# Altium PCB Copy of Game_Consol - Copy.PcbDoc
Units mil, origin at the board's own origin, x right, y up, seen from the top; angles counter-clockwise.
Board outline 3090.55 x 1732.28 mil, 2 copper layers (Top Layer, Bottom Layer); 55 components, 44 nets, 218 pads, 47 vias.
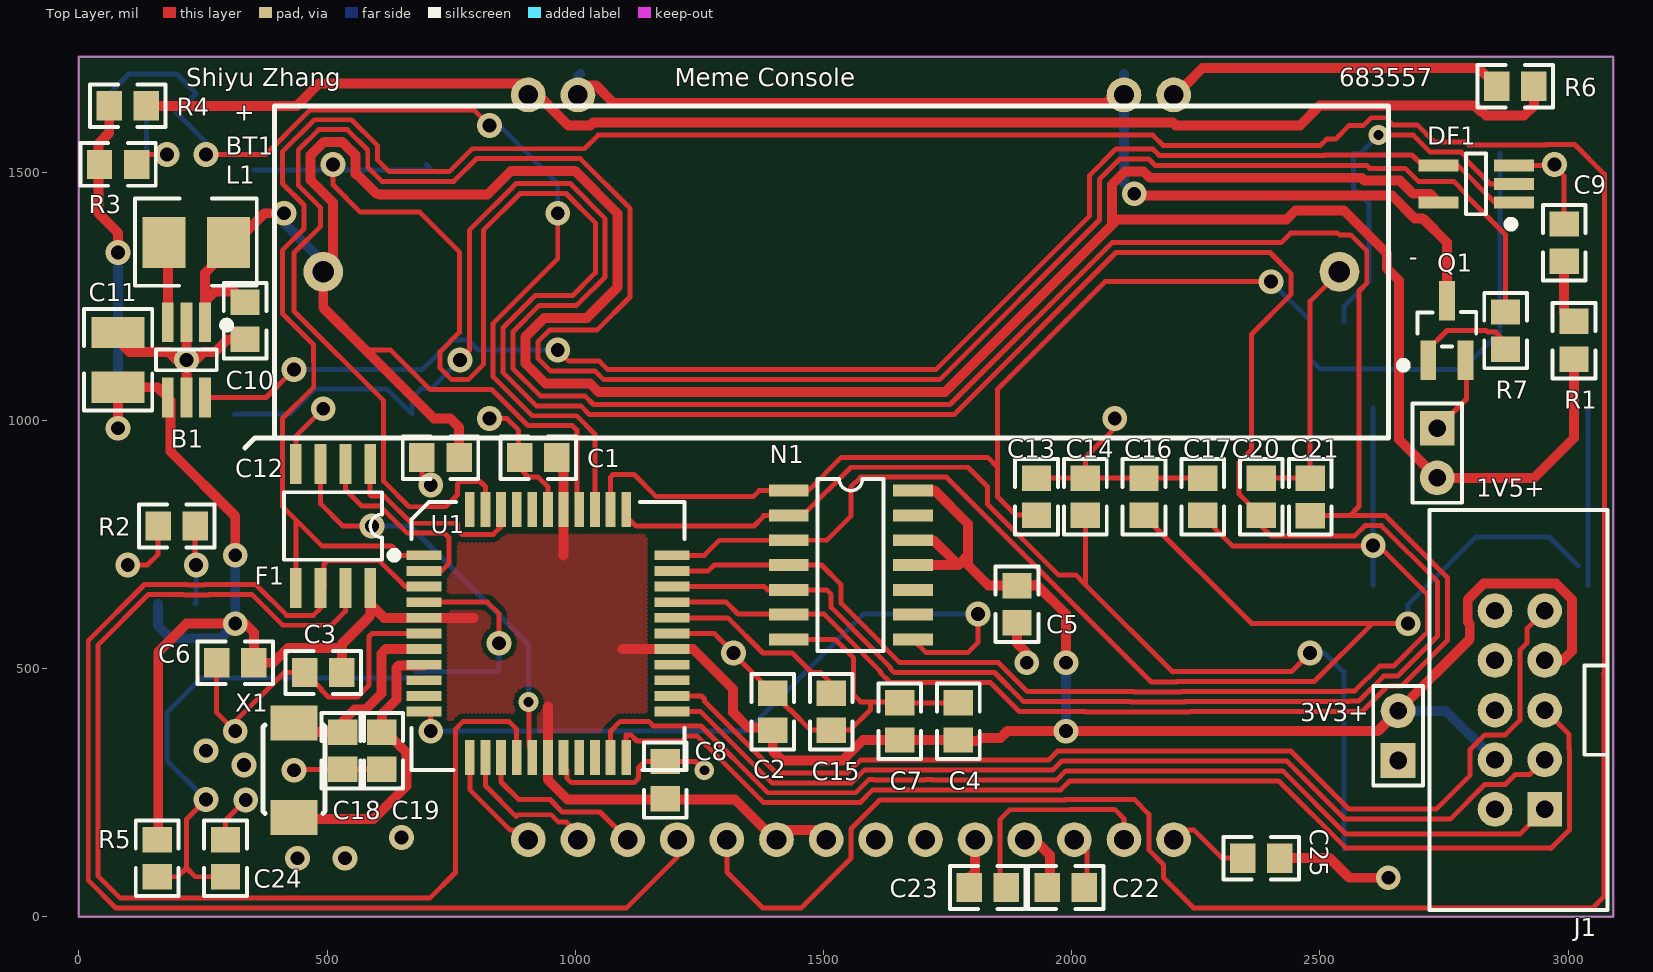
[diagram p0: Top Layer view]
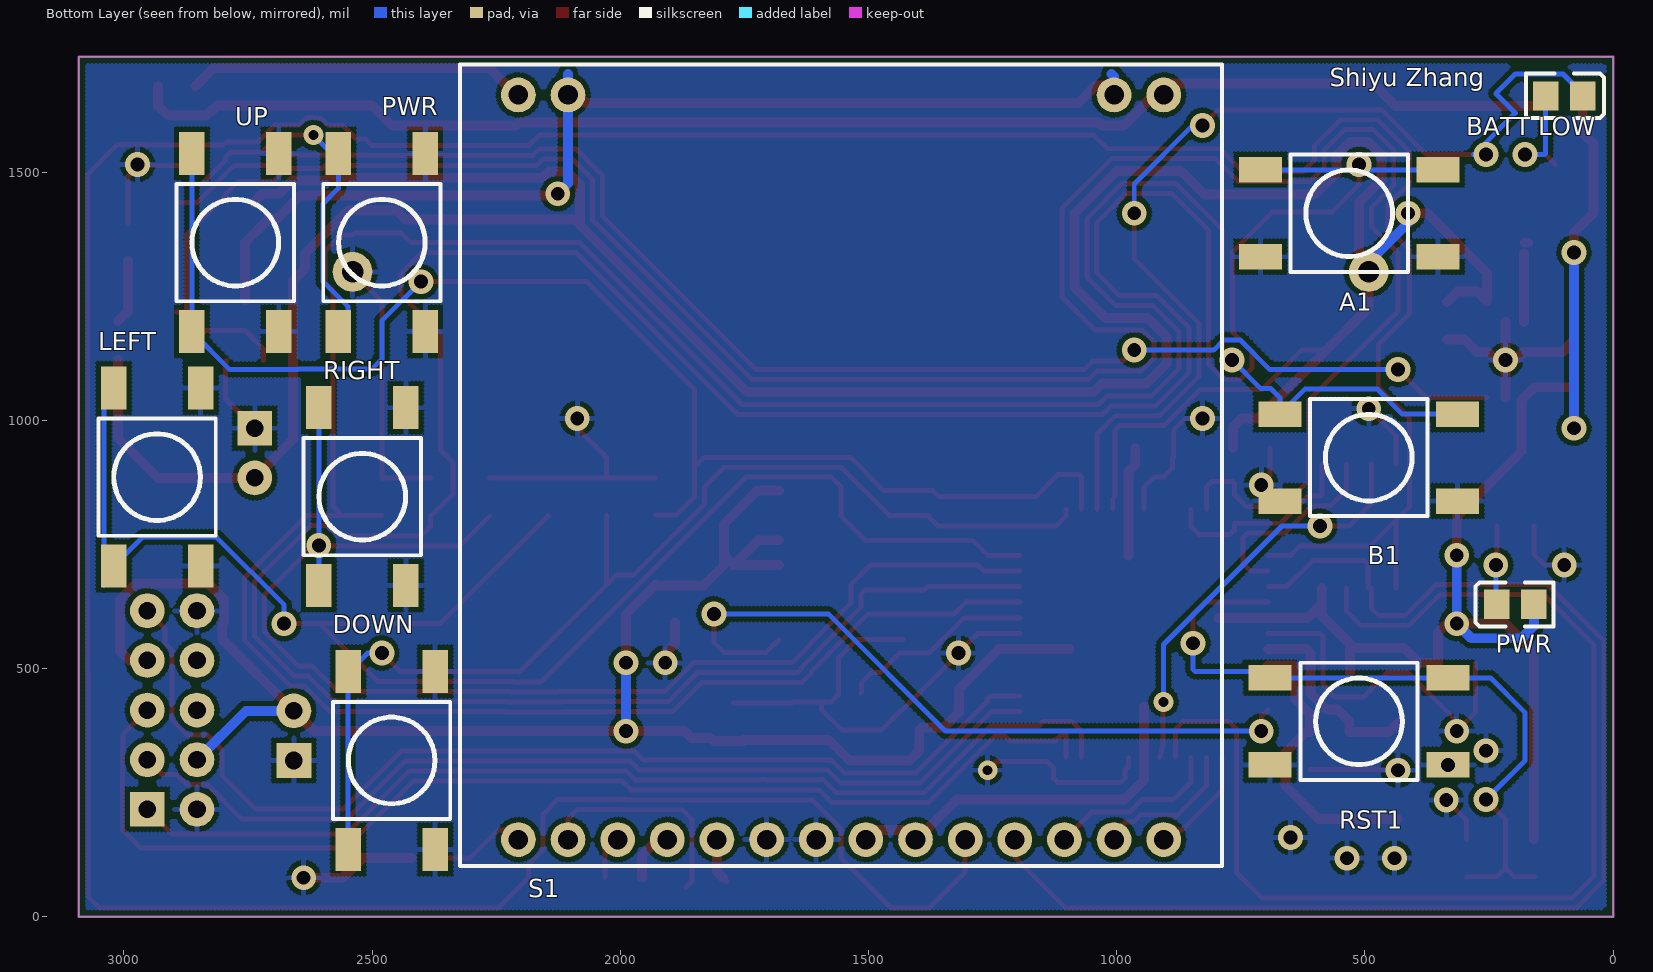
[diagram p1: Bottom Layer view, seen from below]

## Layer stack, top to bottom
Top Solder: solder mask 0.4, Solder Resist, Dk 3.5
Top Layer: signal copper 1.4
Dielectric1: dielectric 12.6, FR-4, Dk 4.8
Bottom Layer: signal copper 1.4
Bottom Solder: solder mask 0.4, Solder Resist, Dk 3.5

## Board outline
0,0 0,1732.28 3090.55,1732.28 3090.55,0

## Design rules (kind name [scope] priority, off if disabled: settings)
AssemblyTestPointUsage [All] p0: scope1count=1 scope1_0_kind=Board scope1_0_value=Board scope2count=1 scope2_0_kind=Board scope2_0_value=Board commentlength=0
AssemblyTestpoint [All] p0: scope1count=1 scope1_0_kind=Board scope1_0_value=Board scope2count=1 scope2_0_kind=Board scope2_0_value=Board commentlength=0
Clearance [All] p0: scope1count=1 scope1_0_kind=Board scope1_0_value=Board scope2count=1 scope2_0_kind=Board scope2_0_value=Board commentlength=0 gap=10
Clearance [All] p1: gap=10
ComponentClearance [All] p0 off: scope1count=1 scope1_0_kind=Board scope1_0_value=Board scope2count=1 scope2_0_kind=Board scope2_0_value=Board commentlength=0 gap=10 collisioncheckmode=3
ComponentClearance [All] p1 off: gap=10 collisioncheckmode=3 verticalgap=10 showdistances=FALSE
DiffPairsRouting [All] p0: scope1count=1 scope1_0_kind=Board scope1_0_value=Board scope2count=1 scope2_0_kind=Board scope2_0_value=Board commentlength=0
DiffPairsRouting [All] p1: maxlimit=20 minlimit=10 mostfreqgap=10 toplayer_minwidth=15 toplayer_maxwidth=15 toplayer_prefwidth=15 bottomlayer_minwidth=15 bottomlayer_maxwidth=15 bottomlayer_prefwidth=15 maxuncoupledlength=500
FabricationTestPointUsage TestPointUsage [All] p0: scope1count=1 scope1_0_kind=Board scope1_0_value=Board scope2count=1 scope2_0_kind=Board scope2_0_value=Board commentlength=0 valid=0 allowmultiple=FALSE
FabricationTestPointUsage TestPointUsage [All] p1: valid=0 allowmultiple=FALSE
FabricationTestpoint Testpoint [All] p0: scope1count=1 scope1_0_kind=Board scope1_0_value=Board scope2count=1 scope2_0_kind=Board scope2_0_value=Board commentlength=0 side=3 testpointundercomponent=TRUE minsize=40 maxsize=100 preferedsize=60 minholesize=0 maxholesize=40 preferedholesize=32 testpointgrid=1
FabricationTestpoint Testpoint [All] p1: side=3 testpointundercomponent=TRUE minsize=40 maxsize=100 preferedsize=60 minholesize=0 maxholesize=40 preferedholesize=32 testpointgrid=1 allowsidetop=TRUE allowsidebottom=TRUE usegrid=TRUE gridtolerance=0.01
FanoutControl Fanout_BGA [All] p0 off: scope1count=1 scope1_0_kind=Board scope1_0_value=Board scope2count=1 scope2_0_kind=Board scope2_0_value=Board commentlength=69 // Protel DXP Scope 1 Expression Was: IsBGA   Fanout_BGA (Default Rule)
FanoutControl Fanout_LCC [All] p0 off: scope1count=1 scope1_0_kind=Board scope1_0_value=Board scope2count=1 scope2_0_kind=Board scope2_0_value=Board commentlength=69 // Protel DXP Scope 1 Expression Was: IsLCC   Fanout_LCC (Default Rule)
FanoutControl Fanout_SOIC [All] p0 off: scope1count=1 scope1_0_kind=Board scope1_0_value=Board scope2count=1 scope2_0_kind=Board scope2_0_value=Board commentlength=71 // Protel DXP Scope 1 Expression Was: IsSOIC   Fanout_SOIC (Default Rule)
FanoutControl Fanout_Small [All] p0 off: scope1count=1 scope1_0_kind=Board scope1_0_value=Board scope2count=1 scope2_0_kind=Board scope2_0_value=Board commentlength=84 // Protel DXP Scope 1 Expression Was: (CompPinCount < 5)   Fanout_Small (Default Rule)
FanoutControl Fanout_Default [All] p0: scope1count=1 scope1_0_kind=Board scope1_0_value=Board scope2count=1 scope2_0_kind=Board scope2_0_value=Board commentlength=30 // Fanout_Default (Default Rule)
Height [All] p0: scope1count=1 scope1_0_kind=Board scope1_0_value=Board scope2count=1 scope2_0_kind=Board scope2_0_value=Board commentlength=0
Height [All] p1: minheight=0 maxheight=7874.02 prefheight=500
HoleSize [All] p0: scope1count=1 scope1_0_kind=Board scope1_0_value=Board scope2count=1 scope2_0_kind=Board scope2_0_value=Board commentlength=0 absolutevalues=TRUE maxlimit=199 minlimit=15 maxpercent=80.000 minpercent=20.000
HoleSize [All] p1: absolutevalues=TRUE maxlimit=199 minlimit=15 maxpercent=80.000 minpercent=20.000
HoleToHoleClearance [All] p0: scope1count=1 scope1_0_kind=Board scope1_0_value=Board scope2count=1 scope2_0_kind=Board scope2_0_value=Board commentlength=0
LayerPairs [All] p0: scope1count=1 scope1_0_kind=Board scope1_0_value=Board scope2count=1 scope2_0_kind=Board scope2_0_value=Board commentlength=0 enforce=TRUE
MinimumAnnularRing [All] p0: scope1count=1 scope1_0_kind=Board scope1_0_value=Board scope2count=1 scope2_0_kind=Board scope2_0_value=Board commentlength=0 minimumring=5
MinimumAnnularRing [All] p1: minimumring=5
MinimumSolderMaskSliver [All] p0: scope1count=1 scope1_0_kind=Board scope1_0_value=Board scope2count=1 scope2_0_kind=Board scope2_0_value=Board commentlength=0
NetAntennae [All] p0: scope1count=1 scope1_0_kind=Board scope1_0_value=Board scope2count=1 scope2_0_kind=Board scope2_0_value=Board commentlength=0
PasteMaskExpansion [All] p0: scope1count=1 scope1_0_kind=Board scope1_0_value=Board scope2count=1 scope2_0_kind=Board scope2_0_value=Board commentlength=0 expansion=0
PlaneClearance [All] p0: scope1count=1 scope1_0_kind=Board scope1_0_value=Board scope2count=1 scope2_0_kind=Board scope2_0_value=Board commentlength=0 clearance=20
PlaneConnect [All] p0: scope1count=1 scope1_0_kind=Board scope1_0_value=Board scope2count=1 scope2_0_kind=Board scope2_0_value=Board commentlength=0 planeconnectstyle=Relief reliefexpansion=20 reliefentries=4 reliefconductorwidth=10 reliefairgap=10
PolygonConnect [All] p0: scope1count=1 scope1_0_kind=Board scope1_0_value=Board scope2count=1 scope2_0_kind=Board scope2_0_value=Board commentlength=0 connectstyle=Relief reliefconductorwidth=10 reliefentries=4 polygonreliefangle="90 Angle"
PolygonConnect [All] p1: connectstyle=Relief reliefconductorwidth=10 reliefentries=4 polygonreliefangle="90 Angle" airgapwidth=10
RoutingCorners [All] p0: scope1count=1 scope1_0_kind=Board scope1_0_value=Board scope2count=1 scope2_0_kind=Board scope2_0_value=Board commentlength=0 cornerstyle=45-Degree minsetback=100 maxsetback=100
RoutingLayers [All] p0: scope1count=1 scope1_0_kind=Board scope1_0_value=Board scope2count=1 scope2_0_kind=Board scope2_0_value=Board commentlength=0 top layer=Automatic bottom layer=Automatic
RoutingPriority [All] p0: scope1count=1 scope1_0_kind=Board scope1_0_value=Board scope2count=1 scope2_0_kind=Board scope2_0_value=Board commentlength=0
RoutingTopology [All] p0: scope1count=1 scope1_0_kind=Board scope1_0_value=Board scope2count=1 scope2_0_kind=Board scope2_0_value=Board commentlength=0 topology=Shortest
RoutingVias [All] p0: scope1count=1 scope1_0_kind=Board scope1_0_value=Board scope2count=1 scope2_0_kind=Board scope2_0_value=Board commentlength=0 holewidth=20 width=40 viastyle="Through Hole" minholewidth=15 minwidth=25 maxholewidth=80 maxwidth=100
RoutingVias [All] p1: holewidth=20 width=40 viastyle="Through Hole" minholewidth=15 minwidth=25 maxholewidth=80 maxwidth=100
ShortCircuit [All] p0: scope1count=1 scope1_0_kind=Board scope1_0_value=Board scope2count=1 scope2_0_kind=Board scope2_0_value=Board commentlength=0 allowed=FALSE
SilkToBoardRegionClearance [All] p0: scope1count=1 scope1_0_kind=Board scope1_0_value=Board scope2count=1 scope2_0_kind=Board scope2_0_value=Board commentlength=0
SilkToSilkClearance [All] p0: scope1count=1 scope1_0_kind=Board scope1_0_value=Board scope2count=1 scope2_0_kind=Board scope2_0_value=Board commentlength=0
SilkToSolderMaskClearance SilkscreenOverComponentPads [All] p0 off: scope1count=1 scope1_0_kind=Board scope1_0_value=Board scope2count=1 scope2_0_kind=Board scope2_0_value=Board commentlength=44 // Protel DXP Scope 1 Expression Was: IsPad
SilkToSolderMaskClearance SilkscreenOverComponentPads [IsPad] p1: minsilkscreentomaskgap=10 clearancetoexposedcopper=TRUE
SolderMaskExpansion [All] p0: scope1count=1 scope1_0_kind=Board scope1_0_value=Board scope2count=1 scope2_0_kind=Board scope2_0_value=Board commentlength=0 expansion=6
SolderMaskExpansion [All] p1: expansion=6
UnRoutedNet [All] p0: scope1count=1 scope1_0_kind=Board scope1_0_value=Board scope2count=1 scope2_0_kind=Board scope2_0_value=Board commentlength=0
UnpouredPolygon [All] p0: scope1count=1 scope1_0_kind=Board scope1_0_value=Board scope2count=1 scope2_0_kind=Board scope2_0_value=Board commentlength=0
Width Width_1 [All] p0: scope1count=1 scope1_0_kind=Net scope1_0_value=VCC scope2count=1 scope2_0_kind=Board scope2_0_value=Board commentlength=0 maxlimit=40 minlimit=15 preferedwidth=20
Width [All] p0: scope1count=1 scope1_0_kind=Board scope1_0_value=Board scope2count=1 scope2_0_kind=Board scope2_0_value=Board commentlength=0 maxlimit=1000 minlimit=6 preferedwidth=10
Width [All] p1: maxlimit=1000 minlimit=6 preferedwidth=10 minimp=50.000000 maximp=50.000000 favimp=50.000000
Width Width_1 [InNet('VCC')] p2: maxlimit=40 minlimit=15 preferedwidth=20 bottomlayer_minwidth=20 minimp=50.000000 maximp=50.000000 favimp=50.000000
23 further rules are at their usual default settings.

## Classes and differential pairs
component class Game_Consol_Power: 1V5+ 3V3+ B1 BT1 C1 C2 C3 C4 C5 C6 C7 C8 C9 C10 C11 C12 DF1 L1 PWR R1 R2
component class Game_Consol_Top: A1 B1 "BATT LOW" C13 C14 C15 C16 C17 C18 C19 C20 C21 C22 C23 C24 C25 DOWN F1 J1 LEFT N1 Q1 R4 R5 R6 R7 RIGHT RST1 U1 UP X1

## Components (designator, comment, footprint, x,y, rotation, side; value= is the part's Value field where it differs from the comment)
1V5+ "Func" HDR1X2 2736.22,984.25 r270 top (schematic designator "VBATT Header1")
3V3+ "Func" HDR1X2 2657.48,314.96 r90 top (schematic designator "VCC Header1")
A1 "A" SPNO_SMD 531.5,1417.32 r180 bottom
B1 "SC120" SOT23-6 216.54,1122.05 r270 top (schematic designator "Boost converter1")
B1 "B" SPNO_SMD 492.13,925.2 r180 bottom
"BATT LOW" "BAT_LOW_LED" 0805D 98.43,1653.54 r0 bottom (schematic designator D2)
BT1 "1.5v" BATT_HOLDER 1515.75,1299.21 r180 top
C1 "100nF" 0805#1 925.2,925.2 r180 top
C2 "100nF" 0805#1 1397.64,413.39 r90 top
C3 "100nF" 0805#1 492.13,492.13 r180 top
C4 "100nF" 0805#1 1771.65,393.7 r90 top
C5 "100nF" 0805#1 1889.76,629.92 r270 top
C6 "100nF" 0805#1 314.96,511.81 r180 top
C7 "100nF" 0805#1 1653.54,393.7 r90 top
C8 "100nF" 0805#1 1181.1,275.59 r90 top
C9 "100nF" 0805#1 2992.13,1358.27 r90 top
C10 "1uF" 0805#1 334.65,1200.79 r270 top
C11 "22uF" 1210 78.74,1122.05 r90 top
C12 "1uF" 0805#1 728.35,925.2 r180 top
C13 "100nF" 0805#1 1929.13,846.46 r90 top
C14 "100nF" 0805#1 2027.56,846.46 r90 top
C15 "100nF" 0805#1 1515.75,413.39 r90 top
C16 "100nF" 0805#1 2145.67,846.46 r90 top
C17 "100nF" 0805#1 2263.78,846.46 r90 top
C18 "18pF" 0805#1 531.5,334.65 r270 top
C19 "18pF" 0805#1 610.24,334.65 r270 top
C20 "100nF" 0805#1 2381.89,846.46 r90 top
C21 "100nF" 0805#2 2480.31,846.46 r90 top
C22 "100nF" 0805#1 1988.19,59.06 r0 top
C23 "100nF" 0805#1 1830.71,59.06 r0 top
C24 "100nF" 0805#1 295.28,118.11 r90 top
C25 "100nF" 0805#1 2381.89,118.11 r0 top
DF1 "74AUG1G80" SOT23-5 2814.96,1476.38 r180 top (schematic designator "D Flip Flop")
DOWN "DOWN" SPNO_SMD 2460.63,314.96 r90 bottom (schematic designator DOWN1)
F1 "FM25L04B" SOIC-8 511.81,787.4 r270 top (schematic designator FRAM1)
J1 "JTAG" BOXEDVERT10 2952.76,216.54 r90 top
L1 "4.7uH" 1210L 236.22,1358.27 r0 top
LEFT "LEFT" SPNO_SMD 2933.07,885.83 r90 bottom (schematic designator LEFT1)
N1 "74AHC30" SOIC-14 1555.12,708.66 r0 top (schematic designator NAND1)
PWR "POWER LED" 0805D 196.85,629.92 r180 bottom (schematic designator D1)
PWR "Power button" SPNO_SMD 2480.32,1358.27 r90 bottom (schematic designator "Power button1")
Q1 "RTR025N03TL" SOT23 2755.91,1181.1 r90 top
R1 "10k" 0805#3 3011.81,1160.43 r270 top
R2 "220" 0805#1 196.85,787.4 r180 top
R3 "10k" 0805#1 78.74,1515.75 r0 top
R4 "15k" 0805#1 98.43,1633.86 r0 top
R5 "10k" 0805#1 157.48,118.11 r270 top
R6 "10k" 0805#1 2893.7,1673.23 r0 top
R7 "15" 0805#1 2874.02,1181.1 r90 top
RIGHT "RIGHT" SPNO_SMD 2519.68,846.46 r90 bottom (schematic designator RIGHT1)
RST1 "RESET" SPNO_SMD 511.81,393.7 r180 bottom (schematic designator RESET_BTN1)
S1 "EA DOGS102x-6" "EA DOGS102x" 1555.28,905.67 r0 bottom (schematic designator LCD)
U1 "ATMEGA16" QFP-48 944.88,570.87 r0 top
UP "UP" SPNO_SMD 2775.59,1358.27 r90 bottom (schematic designator UP1)
X1 "7.68Mhz" XTAL_FLAT_SMD 433.07,295.28 r270 top

## Footprints (in the part's own frame and the unit in brackets; to place one, negate y for a bottom-side part, rotate by r counter-clockwise, add the part's x,y. Pads: shape width x height; smd on the part's side, far side on the other; paste and mask are expansions set on the pad)
0805#1 [mm] "0805 Footprint"
  rect 1.3x1.5 smd: 1(-0.95,0) 2(0.95,0)
  silkscreen extent -1.93,-1.09 1.93,1.09
0805#2 [mm] "0805 Footprint"
  rect 1.3x1.5 smd: 1(-0.975,-0.002) 2(0.95,0)
  silkscreen extent -1.93,-1.09 1.93,1.09
0805#3 [mm] "0805 Footprint"
  rect 1.3x1.5 smd: 1(0.953,0) 2(-1.006,0)
  silkscreen extent -1.93,-1.09 1.93,1.09
0805D [mm] "0805 Diode"
  rect 1.3x1.5 smd: A(0.95,0) K(-0.95,0)
  silkscreen extent -2.03,-1.14 1.95,1.12
1210 [mm]
  rect 1.6x2.7 smd: 1(-1.4,0) 2(1.4,0)
  silkscreen extent -2.6,-1.75 2.6,1.75
1210L [mm] "Precision Wire Wound Inductor, 2-Leads, Body 3.2x3.2mm, IPC Low Density"
  rect 2.2x2.6 smd: 1(-1.651,0) 2(1.651,0)
  silkscreen extent -3.12,-2.21 3.1,2.26
BATT_HOLDER [mil]
  round 80 hole 43.31: 1(1023.62,0) 2(-1023.62,0)
  silkscreen extent -1122,-335 1122,335
BOXEDVERT10 [mil] "IDC Header 2.54mm Boxed 10 pins"
  rect 70x70 hole 35.43: 1(0,0)
  round 70 hole 35.43: 2(0,100) 3(100,0) 4(100,100) 5(200,0) 6(200,100) 7(300,0) 8(300,100) 9(400,0) 10(400,100)
  silkscreen extent -203,-127 603,232
"EA DOGS102x" [mil] "graphics display footprint"
  round 70 hole 39.37: 1(-650,-750) 2(-550,-750) 13(550,-750) 14(650,-750) 15(650,750) 16(550,750) 17(450,750) 18(350,750) 19(250,750) 20(150,750) 21(50,750) 22(-50,750) 23(-150,750) 24(-250,750) 25(-350,750) 26(-450,750) 27(-550,750) 28(-650,750)
  silkscreen extent -768,-811 768,803
HDR1X2 [mil] "Connector; Header; 2 Position"
  rect 70x70 hole 35.43: 1(0,0)
  round 70 hole 35.43: 2(100,0)
  silkscreen extent -50,-50 150,50
QFP-48 [mm]
  rect 1.8x0.5 smd: 1(-6.35,4) 2(-6.35,3.2) 3(-6.35,2.4) 4(-6.35,1.6) 5(-6.35,0.8) 6(-6.35,0) 7(-6.35,-0.8) 8(-6.35,-1.6) 9(-6.35,-2.4) 10(-6.35,-3.2) 11(-6.35,-4) 23(6.35,-4) 24(6.35,-3.2) 25(6.35,-2.4) 26(6.35,-1.6) 27(6.35,-0.8) 28(6.35,0) 29(6.35,0.8) 30(6.35,1.6) 31(6.35,2.4) 32(6.35,3.2) 33(6.35,4)
  rect 0.5x1.8 smd: 12(-4,-6.35) 13(-3.2,-6.35) 14(-2.4,-6.35) 15(-1.6,-6.35) 16(-0.8,-6.35) 17(0,-6.35) 18(0.8,-6.35) 19(1.6,-6.35) 20(2.4,-6.35) 21(3.2,-6.35) 22(4,-6.35) 34(4,6.35) 35(3.2,6.35) 36(2.4,6.35) 37(1.6,6.35) 38(0.8,6.35) 39(0,6.35) 40(-0.8,6.35) 41(-1.6,6.35) 42(-2.4,6.35) 43(-3.2,6.35) 44(-4,6.35)
  silkscreen extent -8,-6.98 6.98,6.73
SOIC-8 [mil] "SOIC-8 Footprint"
  rect 80x24 smd: 1(-125,75) 2(-125,25) 3(-125,-25) 4(-125,-75) 5(125,-75) 6(125,-25) 7(125,25) 8(125,75)
  silkscreen extent -68,-98 68,98
SOIC-14 [mil] "SOIC-14 Footprint"
  rect 80x24 smd: 1(-125,150) 2(-125,100) 3(-125,50) 4(-125,0) 5(-125,-50) 6(-125,-100) 7(-125,-150)
  rect 80x24.02 smd: 8(125,-150) 9(125,-100) 10(125,-50) 11(125,0) 12(125,50) 13(125,100) 14(125,150)
  silkscreen extent -67,-173 66,173
SOT23 [mil] "SOT23, 3-Leads, Body 3.0x2.5mm (max), Pitch 0.95mm, IPC Low Density"
  rect 80.24x31.5 smd: 1(-60,37.4)
  rect 80x31.5 smd: 2(-60,-37.4) 3(60,0)
  silkscreen extent -75,-59 37,93
SOT23-5 [mm]
  rect 2.032x0.6 smd: 1(-1.929,0.95) 2(-1.929,0) 3(-1.929,-0.95) 4(1.929,-0.95) 5(1.929,0.95)
  silkscreen extent -1.9,-1.55 0.53,2.18
SOT23-6 [mm]
  rect 2.032x0.6 smd: 1(-1.929,0.95) 2(-1.929,0) 3(-1.929,-0.95) 4(1.929,-0.95) 5(1.929,0) 6(1.929,0.95)
  silkscreen extent -1.9,-1.55 0.53,2.18
SPNO_SMD [mm] "SP NO SMD Tactile switch"
  rect 2.2x1.3 smd: 1(-4.55,-2.225) 2(4.55,-2.225) 3(-4.55,2.225) 4(4.55,2.225)
  silkscreen extent -3,-3 3,3
XTAL_FLAT_SMD [mm]
  rect 1.8x2.4 smd: 1(-2.412,0) 2(2.413,0)
  silkscreen extent -2.33,-1.59 2.21,1.6

## Part data
1V5+ 3V3+: library part HDR2, "2 Pin Header"
A1 B1 DOWN LEFT PWR RIGHT RST1 UP: library part SW-PB, "Push Button Switch"
B1: "Regulator Low Voltage"
"BATT LOW": library part "LED RED", "Light Emitting Diode"
BT1: library part BAT, "Battery Holder AA 1.5v"
C1 C2 C3 C4 C5 C6 C7 C8 C9 C10 C12 C13 C14 C15 C16 C17 C18 C19 C20 C21 C22 C23 C24 C25: library part "C 0805", "Capacitor 100nF"
C11: library part "C 1210", "Capacitor 22uF"
DF1: "Inverted single D flip flop"
F1: "FRAM 4Kb Memory"
J1: library part JTAG_CON, "JTAG ATMEL connector"
L1: library part "I 1210", "Inductor 4.7uH"
N1: "1 x 8 Input NAND gate"
PWR: library part "LED GREEN", "Light Emitting Diode"
Q1: library part MOSFET-N, "N-Channel MOSFET"
R1 R2 R3 R4 R5 R6 R7: library part R, "Resistor"
S1: "LCD 102x64-pixel with backlight"
U1: "ATMEGA16 Microcontroller"
X1: library part XTAL, "Crystal Oscillator"

## Via types
v1: diameter 50, hole 28, Top Layer to Bottom Layer, tented both sides, 44 vias
v2: diameter 40, hole 20, Top Layer to Bottom Layer, tented both sides, 3 vias

## Nets (pads, with @x,y where several pads share a name; then routed paths per layer and width w, separated by ;. In a path a pad name is that pad's centre, name@x,y a point inside that pad or via, vN(x,y) a via of type N, cw(c..) or ccw(c..) an arc to the next point about the centre after c; other vN are vias at no path point)
GND: 1V5+.1 3V3+.1 A1.1 A1.2 B1.1@671.26,837.6 B1.2 B1.5 BT1.2 C1.2 C2.2 C3.2 C4.2 C5.2 C6.2 C7.2 C8.2 C9.2 C10.2 C11.2 C12.2 C13.2 C14.2 C15.1 C16.2 C17.2 C18.2 C19.2 C20.2 C21.2 C24.2 C25.2 DF1.3 DOWN.1 DOWN.2 F1.4 J1.2 J1.10 LEFT.1 LEFT.2 N1.7 PWR.1 PWR.2 Q1.2 R2.2 RIGHT.1 RIGHT.2 RST1.1 RST1.2 S1.20 S1.21 U1.6 U1.18 U1.28 U1.39 UP.1 UP.2 | length 5133.8
  Top Layer w10: v1(98.43,708.66) 137.8,708.66 159.45,730.32 R2.2 ; C6.2 277.56,411.42 v1(314.96,374.02) 314.96,393.7 413.39,492.13 C3.2 454.78,492.13 488.94,457.97 488.94,456.39 502.41,442.91 561.02,442.91 584.45,466.34 584.45,564.76 590.55,570.87 U1.6 ; C24.2 295.28,194.82 v1(336,235.54) ; v1(433.07,295.28) 435.04,297.24 C18.2 C19.2 ; F1.4 436.81,968.31 v1(492.13,1023.62) ; C3.2@454.72,510.28 C3.2@454.72,511.81 ; C12.2@690.94,944.88 690.94,887.8 v1(708.66,870.08) ; v1(827.21,1003.94) 861.95,1003.94 885.83,980.06 C1.2@885.83,925.2 ; C1.2 887.8,903.54 905.51,885.83 925.2,885.83 944.88,866.14 U1.39 ; U1.18 976.38,302.35 983.03,295.69 983.03,279.22 991.82,270.43 1118.42,270.43 1127.2,279.22 1127.2,300.43 1139.76,312.99 C8.2 1242.13,312.99 v2(1259.84,295.28) ; U1.28 1279.53,570.87 v1(1318.9,531.5) 1318.9,529.53 C2.2 1431.85,416.57 1433.38,416.57 1473.97,375.98 C15.1 1553.15,375.98 1594.49,417.32 1594.49,433.07 ; N1.7 1523.58,558.66 1560.28,521.96 1560.28,447.6 1574.8,433.07 1594.49,433.07 ; C4.2 C7.2 1651.57,433.07 1594.49,433.07 ; C13.2 C14.2 ; v1(2086.61,1003.94) 2086.61,984.25 2027.56,925.2 C14.2 ; C17.2 C16.2 C14.2 ; C20.2 C21.2 2480.31,1240.16 BT1.2@2559.06,1318.9 ; 1V5+.1 2795.28,1043.31 2795.28,1116.85 2793.31,1118.82 Q1.2 ; DF1.3 2970.47,1513.78 2992.13,1492.13 C9.2
  Top Layer w20: C11.2 78.74,1161.42 102.18,1137.98 180.92,1137.98 v1@216.54,1102.36 ; B1.5 v1@216.54,1102.36 ; B1.2@216.54,1197.98 v1@216.54,1102.36 ; C10.2 299.44,1163.39 274.03,1137.98 252.15,1137.98 v1@216.54,1102.36 ; C5.2 1889.76,551.18 1909.45,531.5 v1(1909.45,511.81) ; C25.2 2519.69,118.11 2559.06,78.74 v1(2637.8,78.74)
  other v1: 440,118.11 536,118.11 649.61,160 332.68,306.1 255.91,334.65 216.54,1122.05 2972.43,1515.74
LCD_C1: Q1.3 S1.2 S1.13 | length 2174.9
  Top Layer w20: S1.2@1005.12,1675.2 1041.34,1675.2 1076.73,1639.8 2069.72,1639.8 S1.13@2105.12,1675.2 ; v1(2125.98,1456.69) 2129.68,1453 2644.91,1453 2690.75,1407.17 2707.01,1407.17 2755.91,1358.27 Q1.3
  Bottom Layer w20: 1005.12,1692.91 1010.43,1698.23 ; 2105.12,1698.23 2105.12,1675.2 2105.12,1477.56 v1(2125.98,1456.69)
LCD_CD: S1.26 U1.14 | length 352.1
  Top Layer w10: U1.14 850.39,271.65 885.83,236.22 948.9,236.22 973.9,211.22 1049.72,211.22 S1.26
LCD_CS: S1.28 U1.12 | length 216.1
  Top Layer w10: U1.12 787.4,255.91 868.11,175.2 S1.28@905.12,175.2
LCD_RST: S1.27 U1.13 | length 283.1
  Top Layer w10: U1.13 818.9,263.78 880.79,201.89 884.57,205.67 951.16,205.67 965.61,191.22 981.28,191.22 997.31,175.2 S1.27@1005.12,175.2
LX_L1: B1.3@179.13,1197.98 L1.1 | length 144.6
  Top Layer w20: L1.1 L1.1@177.17,1358.27 ; B1.3@179.13,1197.98 L1.1@179.13,1336.61
MISO: F1.2 U1.2 | length 409.3
  Top Layer w10: F1.2 536.81,860.83 570.24,827.4 607.12,827.4 661.64,772.87 736.53,772.87 745.31,764.09 745.31,711.38 730.79,696.85 U1.2
MOSI: F1.5 S1.24 U1.1 | length 7749
  Top Layer w10: F1.5 436.81,799.82 ; U1.1 648.97,728.35 629.92,747.4 489.23,747.4 436.81,799.82 ; S1.24@1305.12,175.2 1305.12,90.33 1377.95,17.5 1454.51,17.5 1555.28,118.27 1555.28,177.32 1613.66,235.71 1986.45,235.71 1987.28,236.54 2125.67,236.54 2155.28,206.93 2155.28,134.96 2185.04,105.19 2185.04,78.74 2244.09,19.69 2244.09,17.5 3049,17.5 3072.13,40.63 3072.13,488.11 3071.18,489.06 3073.05,490.93 3073.05,1496.06 3013.37,1555.74 2955.87,1555.74 2955.24,1555.12 2799,1555.12 2793.53,1560.59 2730.75,1560.59 2696,1595.34 2647.07,1595.34 2632.61,1609.8 2603.61,1609.8 2588.3,1594.49 2559.06,1594.49 2531.26,1566.69 2513.49,1566.69 2500.7,1553.9 2184.34,1553.9 2163.44,1574.8 1045.89,1574.8 1018.41,1547.32 792.61,1547.32 746.98,1501.69 624.29,1501.69 601.81,1524.17 601.81,1553.03 549.09,1605.75 474.53,1605.75 409.81,1541.03 409.81,1477.46 453.38,1433.89 453.38,1386.22 409.81,1342.65 409.81,1215.45 472.44,1152.82 472.44,1120.19 473.07,1119.56 473.07,1067.2 409.81,1003.94 409.81,826.82 436.81,799.82
NAND_A: C13.1 N1.1 U1.35 UP.3 UP.4 | length 2836.8
  Top Layer w10: U1.35 1070.87,885.83 1076.02,890.98 1118.42,890.98 1162.94,846.46 1358.27,846.46 1370.47,858.66 N1.1 1468.9,858.66 1535.91,925.67 1830.55,925.67 1850.39,905.83 ; C13.1 1887.8,809.06 1850.39,846.46 1850.39,905.83 ; v1(2401.57,1279.53) 2066.93,1279.53 1850.39,1062.99 1850.39,905.83
  Bottom Layer w10: v1@2401.57,1260.39 v1(2401.57,1279.53) 2480.32,1200.78 2480.32,1123.58 2500,1103.9 2647.37,1103.9 2648.91,1102.36 2786.42,1102.36 UP.3 ; UP.3@2863.19,1189.44 UP.4
NAND_B: C14.1 DOWN.3 DOWN.4 N1.2 U1.34 | length 2237.8
  Top Layer w10: U1.34 1102.36,807.09 1122.05,787.4 1359.84,787.4 1379.53,807.09 ; 1379.53,808.66 N1.2 1458.27,808.66 1555.28,905.67 1791.18,905.67 1830.39,866.46 1830.39,831.46 1949.53,712.32 1949.74,712.32 1973.09,688.98 2007.87,688.98 2027.56,669.29 ; C14.1 2027.56,669.29 ; v1(2480.31,531.49) 2442.83,494.02 2204.72,494.02 2203.78,493.07 2027.56,669.29
  Bottom Layer w10: v1(2480.31,531.49) 2508.86,531.49 DOWN.4@2548.23,492.13 ; DOWN.3 DOWN.4@2548.23,492.13 ; DOWN.4 DOWN.4@2548.23,492.13
NAND_C: C16.1 LEFT.3 LEFT.4 N1.3 U1.33 | length 3171
  Top Layer w10: U1.33 1259.84,728.35 1290.16,758.66 N1.3 1506.69,758.66 1555.12,807.09 1555.12,866.14 1574.65,885.67 1747.75,885.67 2160.35,473.07 2212.06,473.07 2213.01,474.02 2488.6,474.02 2605.13,590.55 ; C16.1@2145.67,807.53 2362.42,590.77 2401.8,590.77 ; 2402.02,590.55 2605.13,590.55 ; v1(2677.17,590.55) 2605.13,590.55
  Bottom Layer w10: v1(2677.17,590.55) 2677.17,628.5 2813.67,765 2962.36,765 LEFT.3 ; LEFT.3@3040.35,667.32 LEFT.4@3040.35,1025.59
NAND_D: C17.1 N1.4 RIGHT.3 RIGHT.4 U1.32 | length 2659
  Top Layer w10: U1.32 1267.72,696.85 1279.53,708.66 N1.4 1496.06,708.66 1535.43,669.29 1535.43,631.66 1620.28,546.81 1620.28,545.28 1653.43,512.13 1852.57,512.13 1910.68,454.02 2125.98,454.02 2126.93,453.07 2220.35,453.07 2221.29,454.02 2550.49,454.02 2551.72,455.24 2570.48,455.24 2620.2,504.96 2648.14,504.96 2717.17,573.98 2717.17,648.98 2618.68,747.46 2323.4,747.46 C17.1@2263.78,807.09 ; v1@2606.72,747.46 v1(2607.28,748.03)
  Bottom Layer w10: RIGHT.3 RIGHT.4
NAND_E: A1.3 A1.4 C20.1 N1.5 U1.31 | length 6645.2
  Top Layer w10: v1(511.81,1515.75) 511.81,1474.46 566.81,1419.46 686.84,1419.46 766.46,1339.84 766.46,1177.36 727.71,1138.61 727.71,1105.48 751.15,1082.05 784.28,1082.05 814.57,1112.33 814.57,1382.95 888.94,1457.32 981.14,1457.32 1040.19,1398.27 1040.19,1297.32 994.6,1251.73 919,1251.73 854.57,1187.3 854.57,1096.17 921.33,1029.41 1010.97,1029.41 1028.33,1012.05 1763.13,1012.05 2089.36,1338.27 2399.4,1338.27 2441.57,1296.09 2441.57,1253.32 2362.2,1173.95 2362.2,940.5 2337.36,915.66 2337.36,851.61 C20.1@2381.89,807.09 ; U1.31 1380.32,665.35 1387.01,658.66 N1.5 1506.38,658.66 1515.43,649.61 1515.43,623.37 1600.28,538.53 1600.28,537 1634.49,502.79 1634.49,500.1 1642.46,492.13 1844.28,492.13 1902.39,434.02 2117.7,434.02 2118.64,433.07 2228.63,433.07 2229.58,434.02 2560,434.02 ; C20.1 C20.1@2381.89,807.09 ; 2560,435.24 2578.77,435.24 2628.49,484.96 2656.43,484.96 2737.17,565.7 2737.17,674.72 2623.85,788.03 2590.72,788.03 2570.15,767.46 2401.57,767.46 2381.89,787.15 C20.1@2381.89,807.09
  Bottom Layer w10: A1.4 A1.3 A1.3@699.8,1515.75
NAND_F: B1.3@671.26,1012.8 B1.4@312.99,1012.8 C21.1 N1.6 U1.30 | length 6281.9
  Top Layer w10: v1(767.71,1122.05) 786.46,1140.79 786.46,1383.12 880.66,1477.32 989.42,1477.32 1060.19,1406.55 1060.19,1289.04 1002.88,1231.73 927.29,1231.73 874.57,1179.01 874.57,1104.45 929.61,1049.41 1019.25,1049.41 1036.62,1032.05 1754.85,1032.05 2081.07,1358.27 2421.89,1358.27 2440.94,1377.33 2535.94,1377.33 2539.37,1373.9 2562.15,1373.9 2594.37,1341.68 2594.37,1276.43 2578.74,1260.8 2578.74,826.77 2560.02,808.06 C21.1 ; U1.30 1303.87,633.86 1327.81,609.92 1386.45,609.92 1386.76,610.24 1500.28,610.24 1580.28,530.25 1580.28,528.71 1614.49,494.5 1614.49,491.81 1634.17,472.13 1836,472.13 1894.74,413.39 1970.99,413.39 1971.62,414.02 2027.56,414.02 2028.5,413.07 2236.92,413.07 2237.86,414.02 2585.82,414.02 2636.77,464.96 2664.71,464.96 2757.17,557.41 2757.17,683 2632.14,808.03 C21.1@2500.39,808.03
  Bottom Layer w10: B1.4@312.99,1012.8 424.73,1012.8 475.56,1063.62 508.69,1063.62 509.32,1062.99 621.06,1062.99 671.26,1012.8 671.26,1046.28 688.98,1064 709.67,1064 v1(767.71,1122.05)
NAND_Y: N1.8 U1.11 | length 1481
  Top Layer w10: U1.11 694.88,417.32 708.66,403.54 v1(708.66,374.02) v1@708.66,393.7 ; N1.8 1706.65,532.13 1790.7,532.13 1811.02,552.45 v1(1811.02,610.24)
  Bottom Layer w10: v1(708.66,374.02) 1344.69,374.02 1580.91,610.24 v1(1811.02,610.24)
"NetBoost converter1_6": B1.6 DF1.1 DF1.4 | length 2987
  Top Layer w10: B1.6 376.83,1046.12 v1(433.07,1102.36) ; v1(964.57,1141.73) 986.89,1119.41 1048.25,1119.41 1065.3,1102.36 1726.17,1102.36 2035.98,1412.18 2035.98,1493.97 2088.71,1546.69 2163.26,1546.69 2176.06,1533.9 2508.98,1533.9 2509.88,1534.8 2685.44,1534.8 2706.46,1513.78 DF1.4 2777.56,1513.78 2852.36,1438.98 DF1.1
  Bottom Layer w10: v1(433.07,1102.36) 691.46,1102.36 751.15,1162.05 784.28,1162.05 804.6,1141.73 v1(964.57,1141.73)
NetC9_1: C9.1 R1.2 | length 129
  Top Layer w20: C9.1 2992.13,1219.72 R1.2
NetC15_2: C15.2 U1.29 | length 395.2
  Top Layer w10: U1.29 1307.09,602.36 1377.95,531.5 1437.01,531.5 1476.38,492.13 1494.09,492.13 1513.78,472.44 1513.78,452.76 C15.2
NetC18_1: C18.1 U1.7 X1.1 | length 398.6
  Top Layer w20: X1.1 451.28,372.05 C18.1 531.5,393.7 555.43,417.64 577.09,417.64 609.45,450 609.45,530.71 618.11,539.37 U1.7
NetC19_1: C19.1 U1.8 X1.2 | length 587.7
  Top Layer w20: X1.2@433.07,196.85 593.24,196.85 659.76,263.37 659.76,331.12 618.84,372.05 C19.1 610.24,408.36 639.45,437.57 639.45,501.65 644.01,506.22 694.44,506.22 U1.8@694.88,506.66
NetC22_1: C22.1 S1.18 | length 117.5
  Top Layer w20: S1.18@1905.12,175.2 1955.91,124.41 C22.1@1955.91,78.74
NetC22_2: C22.2 S1.17 | length 107.1
  Top Layer w10: S1.17@2005.12,175.2 2030.71,149.61 C22.2@2030.71,78.74
NetC23_1: C23.1 S1.19 | length 112.5
  Top Layer w10: C23.1@1785.43,70.87 C23.1@1793.31,78.74
  Top Layer w20: C23.1@1793.31,78.74 1805.12,90.55 S1.19@1805.12,175.2
NetC23_2: C23.2 S1.16 | length 431.4
  Top Layer w10: C23.2 1855.12,72.05 1855.12,134.8 1855.28,134.96 1855.28,176.38 1855.12,176.54 1855.12,195.91 1874.92,215.71 1994.73,215.71 1995.56,216.54 2086.61,216.54 2105.12,198.03 S1.16@2105.12,175.2
NetC25_1: C25.1 S1.15 | length 163
  Top Layer w10: S1.15@2205.12,175.2 2246.06,175.2 2303.15,118.11 C25.1
NetD1_K: PWR.K R2.1 | length 159.1
  Top Layer w10: R2.1 234.25,710.63 v1(236.22,708.66)
  Bottom Layer w10: PWR.K 236.22,631.89 v1(236.22,708.66)
NetD2_A: "BATT LOW.A" R3.2 | length 227.5
  Top Layer w10: R3.2 135.82,1535.43 v1(177.16,1535.43)
  Bottom Layer w10: 135.83,1653.54 135.83,1537.4 137.8,1535.43 v1(177.16,1535.43)
"NetD Flip Flop_2": DF1.2 PWR.3 PWR.4 | length 754.9
  Top Layer w10: v2(2618.11,1574.8) 2688.25,1574.8 2722.46,1540.59 2785.24,1540.59 2794.03,1531.8 2794.03,1525.59 2843.24,1476.38 DF1.2
  Bottom Layer w10: PWR.3@2548.23,1198.82 2548.23,1229.33 2598.43,1279.53 2598.43,1437.01 2567.91,1467.52 PWR.4 2580.71,1537.4 v2(2618.11,1574.8)
NetLCD_1: R4.2 R6.2 S1.1 | length 2925.8
  Top Layer w20: R4.2 439,1633.86 483.69,1678.54 901.77,1678.54 905.12,1675.2 985.83,1594.49 1030.22,1594.49 1035.54,1599.8 2203.99,1599.8 2209.31,1594.49 2459.68,1594.49 2500,1634.8 2811.32,1634.8 2822.42,1623.7 2825.12,1623.7 2834.65,1614.17 2911.42,1614.17 2931.1,1633.86 R6.2
NetLCD_14: R6.1 S1.14 | length 711.3
  Top Layer w20: S1.14@2205.12,1675.2 2229.19,1675.2 2263.78,1709.78 2819.74,1709.78 R6.1
  Bottom Layer w10: S1.14@2205.12,1675.2 S1.14@2226.77,1653.54
NetQ1_1: Q1.1 R7.1 | length 217
  Top Layer w10: Q1.1 2718.5,1143.7 2755.91,1181.1 2814.96,1181.1 2835.09,1181.1 2838.27,1177.91 2854.33,1177.91 2872.49,1159.76 R7.1@2872.49,1143.7
RAM_CS: F1.1 U1.42 | length 408.2
  Top Layer w10: F1.1 586.81,850.2 589.61,847.4 615.4,847.4 669.93,792.87 762.56,792.87 762.56,779.22 771.35,770.43 834.95,770.43 850.39,785.87 U1.42
RAM_HOLD: F1.7 U1.15 | length 2333.3
  Top Layer w10: F1.7 536.81,615.55 513.12,591.86 508.66,587.4 410.31,587.4 348.11,649.61 262.02,649.61 261.07,648.66 211.37,648.66 210.42,649.61 140.28,649.61 38.74,548.06 38.74,81.86 83.1,37.5 706.79,37.5 758.51,89.21 758.51,378.14 774.06,393.7 866.14,393.7 881.89,377.95 U1.15
RAM_WP: F1.3 U1.16 | length 845.6
  Top Layer w10: F1.3 486.81,832.09 531.5,787.4 v1(590.55,787.4) ; v2(905.51,433.07) 906.73,431.85 906.73,347.2 U1.16
  Bottom Layer w10: v1(590.55,787.4) 666.81,787.4 905.51,548.69 v2(905.51,433.07)
SCK: F1.6 S1.25 U1.3 | length 2658.6
  Top Layer w10: U1.3 657.07,665.35 605.02,717.4 500.87,717.4 493.81,710.35 493.81,662.4 F1.6 486.81,622.05 472.16,607.4 418.6,607.4 356.39,669.61 253.73,669.61 252.79,668.66 219.65,668.66 218.71,669.61 132,669.61 18.74,556.35 18.74,73.57 74.81,17.5 1102.78,17.5 1205.12,119.84 S1.25@1205.12,175.2
U_LCD_BACKLIGHT: R7.2 U1.43 | length 4776.5
  Top Layer w10: U1.43 818.9,866.14 808,877.04 767.72,877.04 762.56,871.88 762.56,850.09 738.62,826.14 664.95,826.14 613.81,877.28 613.81,1039.73 433.39,1220.16 433.39,1337.94 486.81,1391.36 486.81,1428.75 441.81,1473.75 441.81,1544.74 482.82,1585.75 540.81,1585.75 581.81,1544.74 581.81,1509.96 581.97,1509.96 610.24,1481.69 755.26,1481.69 800.89,1527.32 1010.13,1527.32 1110.19,1427.26 1110.19,1248.62 1043.31,1181.73 948,1181.73 924.57,1158.3 924.57,1125.16 950.32,1099.41 1039.97,1099.41 1057.33,1082.05 1734.14,1082.05 2055.98,1403.89 2055.98,1485.69 2096.99,1526.69 2154.98,1526.69 2167.77,1513.9 2594.15,1513.9 2600.05,1508 2671.79,1508 2698.09,1481.69 2769.34,1481.69 2794.03,1457 2794.03,1454.02 2874.02,1374.04 R7.2 R7.2@2893.7,1218.5
U_REDLED: "BATT LOW.K" U1.36 | length 2066.5
  Top Layer w10: v1(255.9,1535.43) 375.93,1535.43 466.25,1625.75 795.51,1625.75 v1(826.77,1594.49) ; v1(964.57,1417.32) 964.57,1325.58 834.57,1195.58 834.57,1087.88 913.04,1009.41 1002.69,1009.41 1039.37,972.73 U1.36
  Bottom Layer w10: 61.02,1653.54 61.02,1658.26 100.84,1698.07 196.85,1698.07 236.22,1658.7 196.85,1619.33 280.75,1535.43 v1(255.9,1535.43) ; v1(826.77,1594.49) 846.46,1594.49 964.57,1476.38 v1(964.57,1417.32)
U_RESET: C24.1 R5.2 RST1.3 RST1.4 U1.4 | length 1500.3
  Top Layer w10: R5.2 198.82,80.71 216.54,98.43 ; v1(255.91,236.22) 216.54,196.85 216.54,98.43 ; C24.1 234.25,80.71 216.54,98.43 ; U1.4 822.83,633.86 846.46,610.24 v1(846.46,551.18)
  Bottom Layer w10: v1(255.91,236.22) 177.17,314.96 177.17,411.42 247.05,481.3 RST1.4 RST1.3 ; RST1.3@678.15,494.09 841.92,494.09 846.46,498.63 v1(846.46,551.18)
U_TCK: J1.1 U1.21 | length 2095.3
  Top Layer w10: U1.21 1070.87,374.02 1090.55,393.7 1148.08,393.7 1157.3,384.48 1253.18,384.48 1387.71,249.96 1565.05,249.96 1591.31,276.22 1600.72,276.22 1601.23,275.71 1705.85,275.71 1706.36,276.22 1718.83,276.22 1719.34,275.71 1969.88,275.71 1988.19,294.02 2425.01,294.02 2552.49,166.54 2902.76,166.54 J1.1
U_TDI: J1.9 U1.24 | length 2188.3
  Top Layer w10: U1.24 1254.14,444.88 1260.16,438.87 1260.16,434.08 1404.27,289.96 1548.48,289.96 1574.74,316.22 1617.29,316.22 1617.8,315.71 1689.28,315.71 1689.8,316.22 1735.4,316.22 1735.91,315.71 1953.31,315.71 1971.62,334.02 2441.57,334.02 2558.74,216.85 2734.08,216.85 2802.76,285.53 2802.76,337.25 2832.05,366.54 2873.47,366.54 2902.76,395.82 2902.76,537.25 2917.4,551.89 2917.4,581.18 J1.9
U_TDO: J1.3 U1.23 | length 1934.5
  Top Layer w10: U1.23 1252.57,413.38 1395.99,269.96 1556.77,269.96 1583.03,296.22 1609.01,296.22 1609.52,295.71 1697.57,295.71 1698.08,296.22 1727.12,296.22 1727.63,295.71 1961.6,295.71 1979.9,314.02 2433.29,314.02 2550.46,196.85 2762.36,196.85 2832.05,266.54 2873.47,266.54 2893.7,286.77 2922.99,286.77 J1.3
U_TMS: J1.5 U1.22 | length 2363.3
  Top Layer w10: U1.22 1102.36,366.61 1111.81,366.61 1124.09,354.33 1215.48,354.33 1225.63,364.48 1244.9,364.48 1379.42,229.96 1573.33,229.96 1599.08,255.71 1978.17,255.71 1996.47,274.02 2416.72,274.02 2551.7,139.04 2963.99,139.04 2965.23,137.8 3002.76,175.32 3002.76,337.25 3001.97,338.03 3001.97,367.32 J1.5
VBATT: 1V5+.2 B1.1@253.94,1197.98 BT1.1 C10.1 C12.1 DF1.5 L1.2 R1.1 U1.37 | length 6762.4
  Top Layer w10: 577.5,1141.73 628.03,1141.73 707.71,1062.05 832.12,1062.05 904.76,989.41 994.4,989.41 1003.19,980.62 1003.19,847.2 1007.87,842.52 U1.37
  Top Layer w20: C10.1 312.99,1259.84 273.62,1259.84 253.94,1240.16 253.94,1297.24 374.01,1417.32 v1(413.38,1417.32) ; C12.1@765.75,944.88 765.75,986.22 748.03,1003.94 715.29,1003.94 577.5,1141.73 492.13,1227.1 492.13,1297.11 511.81,1316.8 511.81,1439.11 466.81,1484.11 466.81,1534.39 493.17,1560.75 530.45,1560.75 556.81,1534.39 556.81,1496.06 560.35,1496.06 599.72,1456.69 603.92,1456.69 605.55,1455.06 823.05,1455.06 870.3,1502.32 999.77,1502.32 1085.19,1416.91 1085.19,1268.3 1023.62,1206.73 937.64,1206.73 899.57,1168.66 899.57,1114.81 939.97,1074.41 1029.61,1074.41 1046.97,1057.05 1744.5,1057.05 2080.98,1393.54 ; DF1.5 2721.32,1456.69 2687.48,1456.69 2661.17,1483 2589.7,1483 2583.8,1488.9 2157.42,1488.9 2144.62,1501.69 2107.34,1501.69 2080.98,1475.33 2080.98,1393.54 ; R1.1 3011.81,964.57 2931.5,884.25 1V5+.2 2659.06,961.42 2659.06,1281.97 2635.31,1305.71 2635.31,1336.1 2548.77,1422.64 2450.9,1422.64 2432.93,1404.67 2092.11,1404.67 2080.98,1393.54
  Bottom Layer w20: v1(413.38,1417.32) 413.38,1397.64 BT1.1@492.13,1318.9
VCC: 3V3+.2 B1.4@179.13,1046.12 C1.1 C2.1 C3.1 C4.1 C5.1 C6.1 C7.1 C8.1 C11.1 F1.8 J1.4 J1.7 N1.11 N1.12 N1.14 PWR.A R3.1 R4.1 R5.1 S1.22 S1.23 U1.5 U1.17 U1.27 U1.38 | length 7476.4
  Top Layer w20: R4.1 61.02,1579.47 39.37,1557.81 39.37,1417.32 78.74,1377.95 v1(78.74,1338.58) ; v1(78.74,984.25) C11.1 158.32,1066.93 179.13,1046.12 184.72,1040.53 184.72,937.32 314.96,807.09 v1(314.96,728.35) ; R5.1@159.77,155.51 159.77,533.79 216.54,590.55 v1(314.96,590.55) 334.65,590.55 352.36,572.83 C6.1 391.01,511.81 420.85,541.65 529.53,541.65 ; C3.1 529.53,549.21 586.81,606.5 F1.8 586.81,629.92 614.37,602.36 U1.5 795.28,602.36 ; 944.88,424 U1.17 944.88,275.59 984.25,236.22 1321.88,236.22 1382.9,175.2 S1.22@1505.12,175.2 ; C1.1@962.6,944.88 962.6,911.42 976.38,897.64 U1.38 976.38,727.87 ; 1094.49,539.37 U1.27 1236.95,539.37 1317.55,458.76 1317.55,412.04 1348.11,381.48 1392.14,381.48 C2.1 1397.64,334.65 1417.32,314.96 1538.13,314.96 1579.47,356.3 C7.1 1750,356.3 1751.97,354.33 1810.66,354.33 1816.92,360.59 1856.65,360.59 1870.08,374.02 v1(1988.19,374.02) 2616.54,374.02 3V3+.2 2801.85,559.33 2801.85,589.66 2797.76,593.75 2797.76,639.32 2829.97,671.54 2975.54,671.54 3007.76,639.32 3007.76,535.55 2988.74,516.54 J1.7 ; N1.11 1771.65,708.66 ; N1.12 1721.65,758.66 1771.65,708.66 ; N1.14 1724.09,858.66 1791.34,791.42 1791.34,728.35 ; v1(1988.18,511.81) 1988.18,609.88 1928.95,669.11 1927.17,667.32 C5.1 1832.68,667.32 1791.34,708.66 1791.34,728.35 ; 1771.65,708.66 1791.34,728.35
  Bottom Layer w20: v1(78.74,984.25) v1(78.74,1338.58) ; PWR.A 159.45,585.72 184,561.17 285.57,561.17 v1(314.96,590.55) v1(314.96,728.35) ; v1(1988.19,374.02) v1(1988.18,511.81) ; 3V3+.2 2754.33,414.96 J1.4
pads on no net: J1.6 J1.8 N1.9 N1.10 N1.13 U1.9 U1.10 U1.19 U1.20 U1.25 U1.26 U1.40 U1.41 U1.44

## Polygon pours and split planes (outlines as drawn)
VCC on Top Layer "Top Layer-No Net" (hatched 90Degree grid 8 track 10, pour order 14): 736.53,772.87 741.69,767.72 1141.73,767.72 1141.73,374.02 728.35,374.02
GND on Bottom Layer "Top Layer-No Net" (hatched 90Degree grid 8 track 10, pour order 16): 0,1732.28 3090.55,1732.28 3090.55,0 19.68,0 0,19.68

## Keep-outs
Keep-Out Layer:
  the board outline again, w5

## Silkscreen, mask and mechanical layers (free items; w line width, h text height)
Top Overlay:
  lines w10: 334.65,944.88 354.33,964.57 649.61,964.57
  text "Shiyu Zhang" at 216.54,1673.23 h36
  text "Meme Console" at 1200.79,1673.23 h36
  text "683557" at 2539.37,1673.23 h36
Bottom Overlay:
  text "Shiyu Zhang" at 570.87,1673.23 h36
Mechanical 1:
  lines w5: 0,0 0,1732.28 3090.55,1732.28 3090.55,0 0,0
  lines w10: 0,0 3090.55,0 3090.55,1732.28 0,1732.28 0,0

## Text inside footprints (layer, text, board x,y; h text height)
BT1: Top Overlay "-" at 2696.85,1338.58 h36 r180; Top Overlay "+" at 354.33,1633.86 h36 r180
S1: Mechanical 1 "683557" at 3051.18,1673.23 h36